# EAGLE board HLD-stat-tracker-spacers (EAGLE 9.6.1)
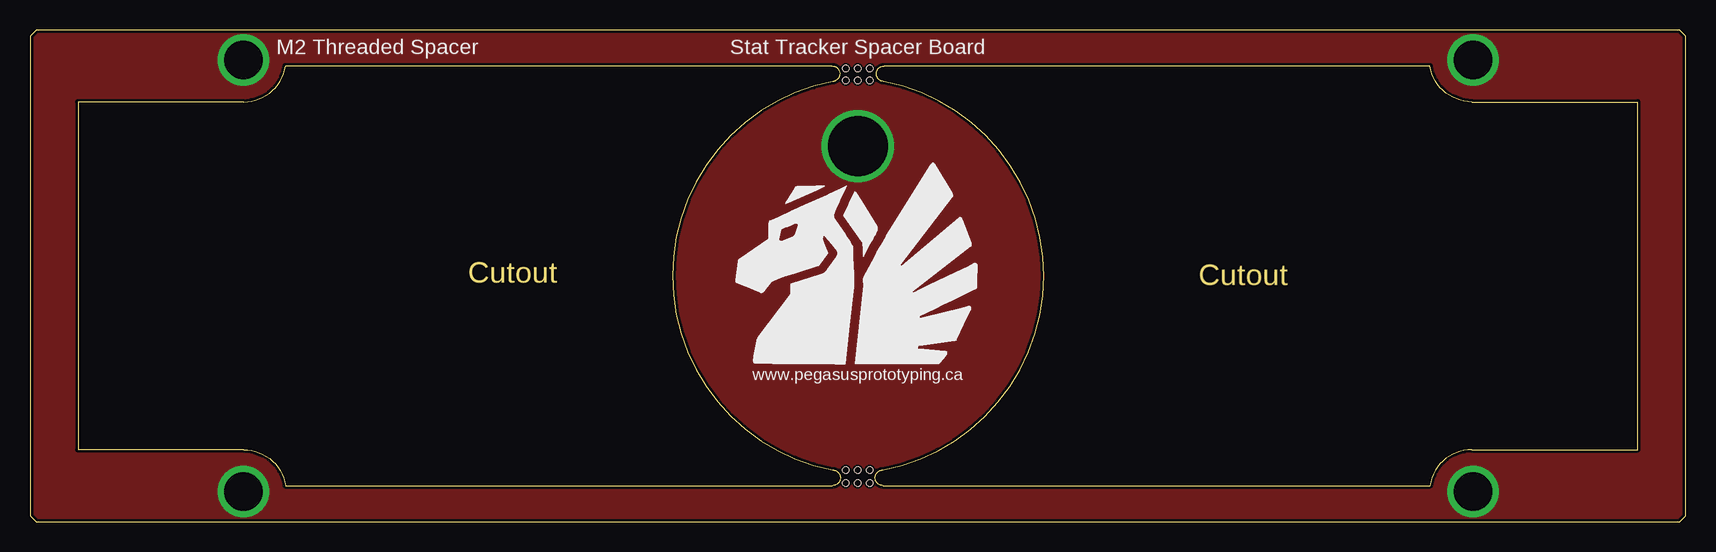
[diagram p0: board, top side]
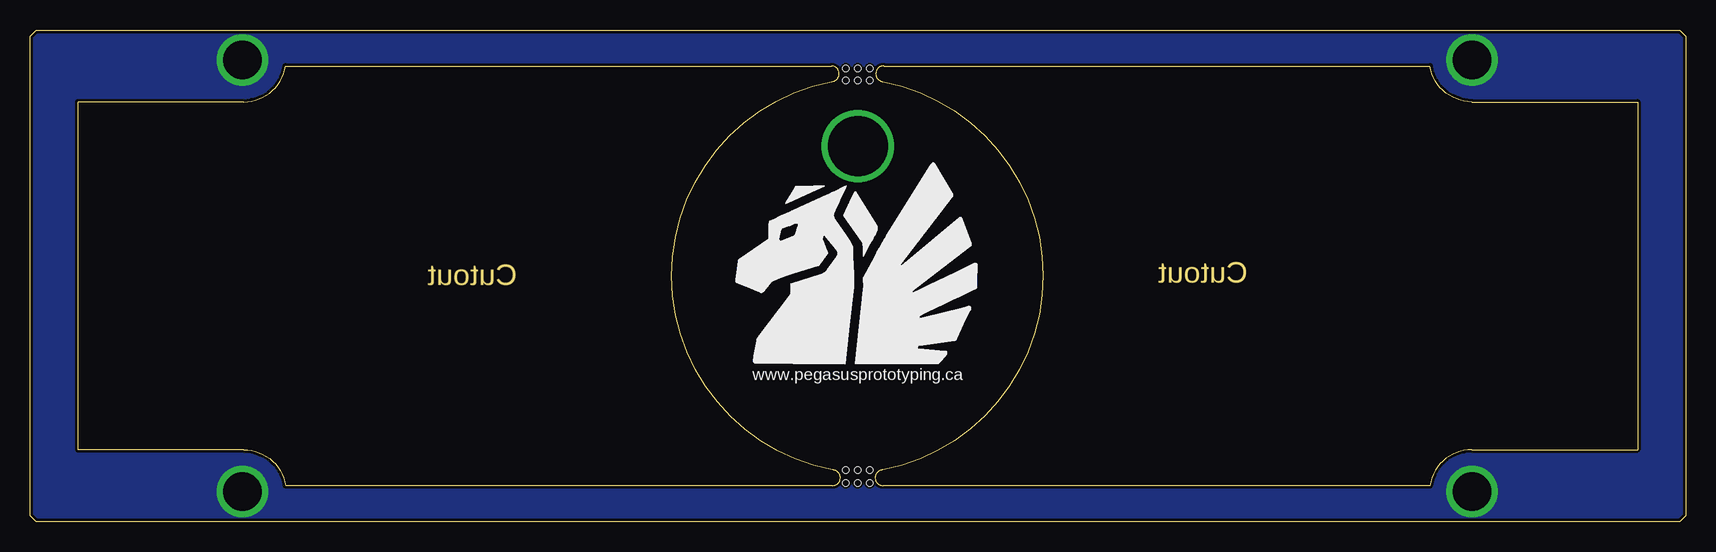
[diagram p1: board, bottom side, seen from below]

Size 138 x 41 mm. Coordinates in mm from the lower left corner, seen from the top.
Outline: 137.5,0 138,0.5 138,40.5 137.5,41 0.5,41 0,40.5 0,0.5 0.5,0 137.5,0
Outline: 4,35 4,6 17.8,6 arc-81 21.3,3 66.9,3 arc180 66.9,4.3 arc-158 66.9,36.7 arc180 66.8,38 21.3,38 arc-81 17.8,35 4,35
Outline: 116.7,38 71.2,38 arc180 71.2,36.7 arc-158 71.1,4.3 arc180 71.1,3 116.7,3 arc-81 120.2,6 134,6 134,35 120.2,35 arc-81 116.7,38
Copper layers (1*16): Top 0.035mm / dielectric 1.5mm / Bottom 0.035mm
Design rules "Makerfabs Eagle Rule 2016-06-12": minimum track width 6mil, minimum drill 0.3mm, track to track 6mil, track to pad 6mil, pad to pad 6mil, via to via 6mil, smd to smd 0mil, copper to edge 0.2mm, drill to drill 10mil, minimum pad ring 10mil, minimum via ring 6mil, stop-mask expansion 2mil, vias tented up to drill 25mil, thermal gap 10mil
Net classes: 1 touch: width 0.2 mm, clearance 0.2 mm
Holes 0.5 mm at 69,4.3 68,4.3 70,4.3 69,37.8 70,37.8 68,37.8 69,3.2 68,3.2 70,3.2 69,36.8 68,36.8 70,36.8

## Placement (x,y rotation side)
E$1  [PEGASUSPROTOTYPING_33MM]  69,21.6 0 top
E$2  [PEGASUSPROTOTYPING_33MM]  69,21.61 0 bottom

## Library data of the parts
E$1 E$2 = Albert

## Tracks (layer width: path | path; a pad name or v marks a point on that pad's centre or on a via)
GND  (via drill 3.2 pad 4.3)
  other vias: 17.8,38.5 17.8,2.5 120.3,38.5 120.3,2.5
  pour Top (rank 5): 0,41.2 138,41.2 138,0 0,0
  pour Bottom (rank 5): 0,41.2 138,41.2 138,0 0,0
PEGASUS  (via drill 5)
  other vias: 69,31.3
  pour Top (rank 2): 59.5,36.6 86,36.6 86,5.4 86,4.5 54.3,4.5 52.1,4.5 52.1,36.2 52.1,36.6

## Text on the board
Dimension: Cutout | Cutout
tPlace: M2 Threaded Spacer | Stat Tracker Spacer Board | www.pegasusprototyping.ca
bPlace: www.pegasusprototyping.ca